# Altium PCB USB_Serial_CH340G.PcbDoc
Units mil, origin at the board's own origin, x right, y up, seen from the top; angles counter-clockwise.
Board outline 1910 x 690 mil, 2 copper layers (Top Layer, Bottom Layer); 17 components, 20 nets, 60 pads, 18 vias.
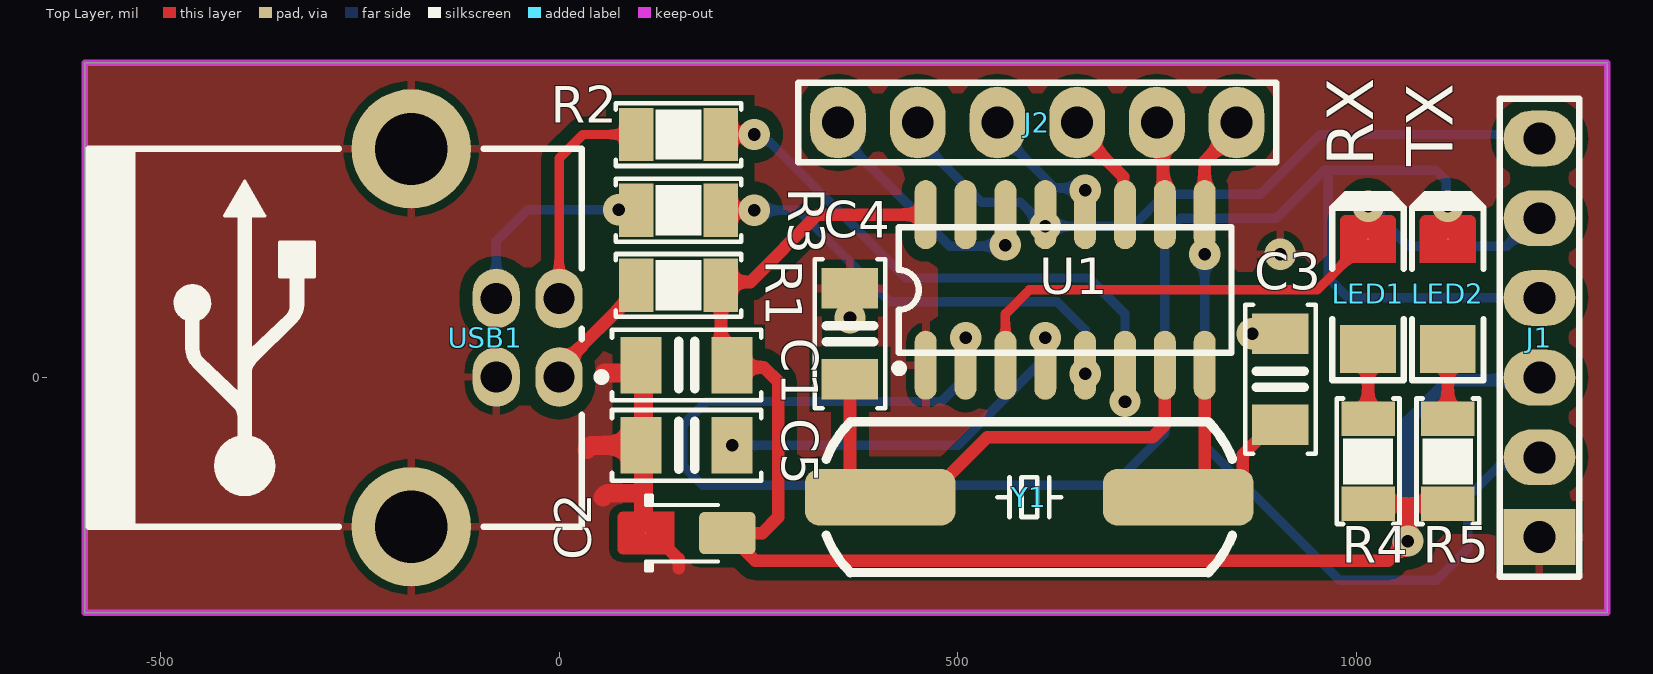
[diagram p0: Top Layer view]
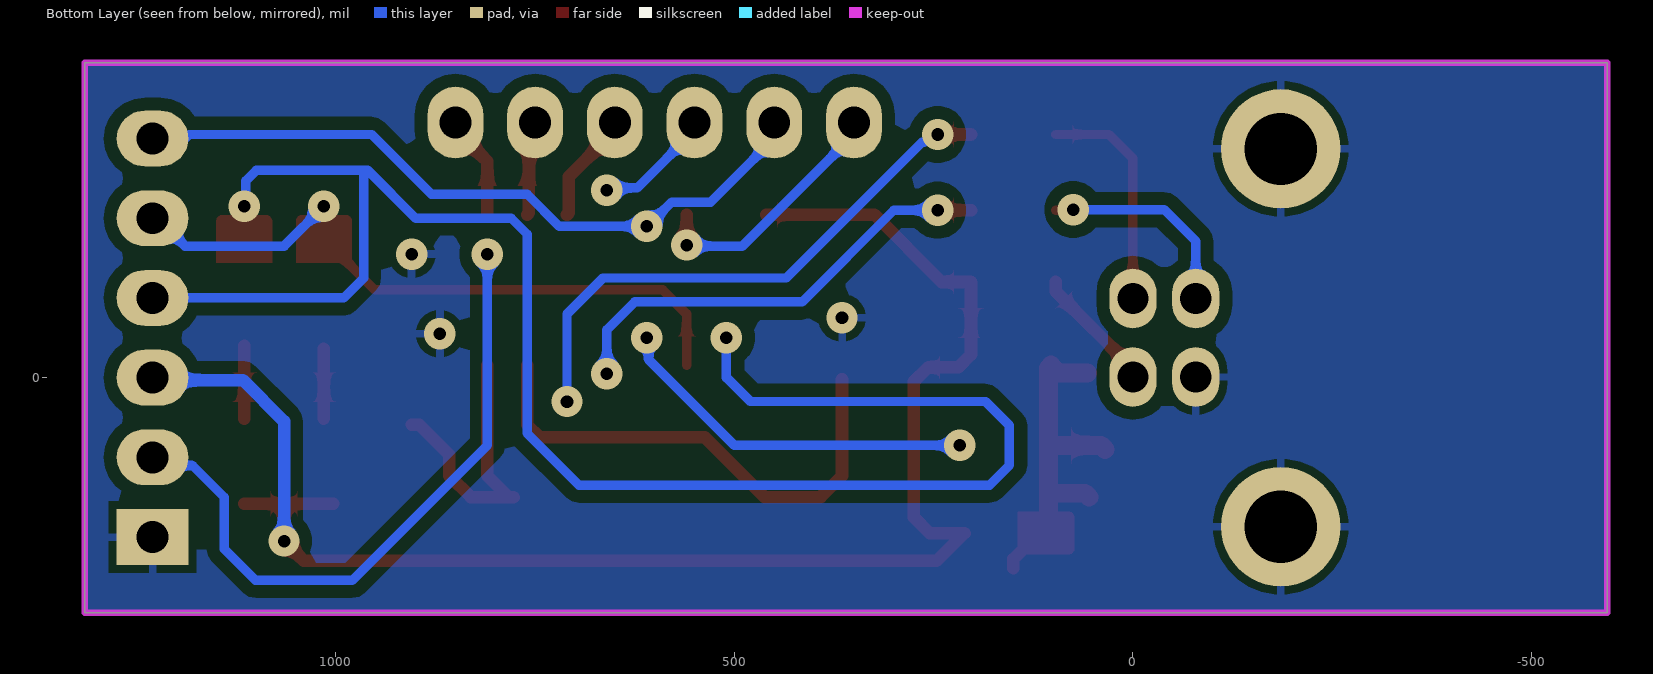
[diagram p1: Bottom Layer view, seen from below]
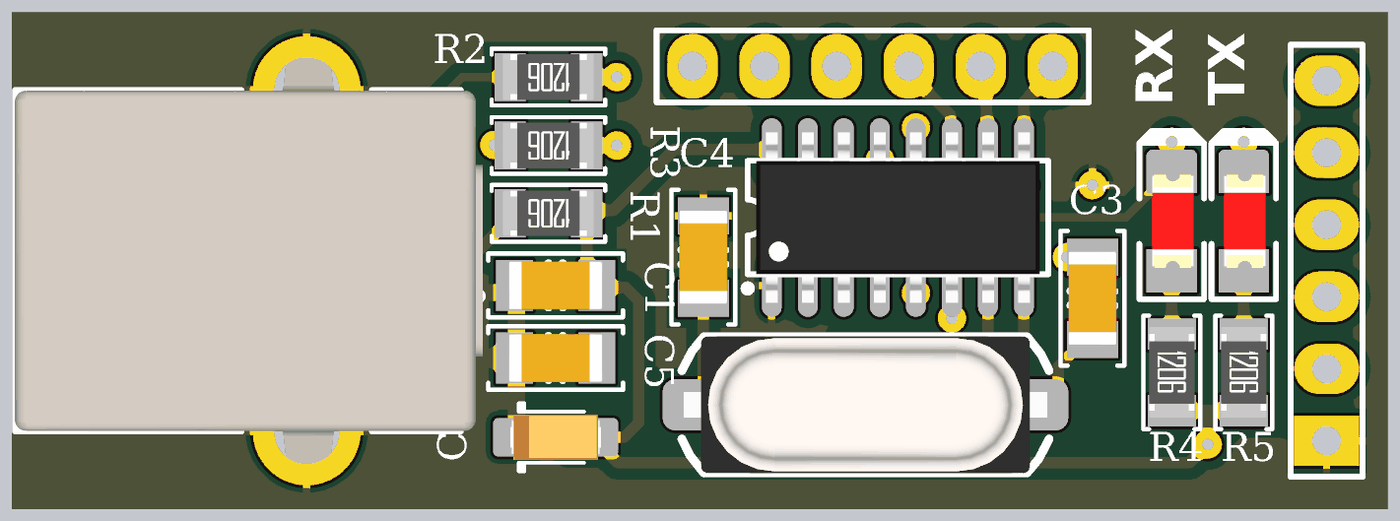
[diagram p2: 3D render of the assembled board from above, using the file's embedded part models]

## Layer stack, top to bottom
Top Solder: solder mask 0.4, Solder Resist, Dk 3.5
Top Layer: signal copper 1.4
Dielectric 1: dielectric 12.6, FR-4, Dk 4.8
Bottom Layer: signal copper 1.4
Bottom Solder: solder mask 0.4, Solder Resist, Dk 3.5

## Board outline
-595,-295.79 -595,394.21 1315,394.21 1315,-295.79

## Design rules (kind name [scope] priority, off if disabled: settings)
Clearance [All] p1: gap=15.75 ignorepadtopadclearanceinfootprint=FALSE
DiffPairsRouting [All] p1: maxlimit=10 minlimit=10 mostfreqgap=10 toplayer_minwidth=15 toplayer_maxwidth=15 toplayer_prefwidth=15 bottomlayer_minwidth=15 bottomlayer_maxwidth=15 bottomlayer_prefwidth=15 maxuncoupledlength=500
PolygonConnect [All] p1: connectstyle=Relief reliefconductorwidth=10 reliefentries=4 polygonreliefangle="90 Angle" airgapwidth=10
RoutingVias [All] p1: holewidth=28 width=50 viastyle="Through Hole" minholewidth=28 minwidth=50 maxholewidth=28 maxwidth=50
SolderMaskExpansion [All] p1: expansion=4 istentingtop=FALSE
Width [All] p1: maxlimit=39.37 minlimit=10 preferedwidth=11.81
29 further rules are at their usual default settings.

## Classes and differential pairs
differential pair class USB: USB_D
net class USB: USB_D_N USB_D_P
differential pair USB_D: +USB_D_P -USB_D_N

## Components (designator, comment, footprint, x,y, rotation, side; value= is the part's Value field where it differs from the comment)
C1 "100nF" "CAP 1206 (3216X15L)" 160,15 r0 top
C2 "1uF-35V" "CAP SMD A (EIA1206)" 160,-195.79 r180 top
C3 "22pF" "CAP 1206 (3216X15L)" 905,-2.87 r270 top
C4 "22pF" "CAP 1206 (3216X15L)" 365,54.21 r90 top
C5 "22nF" "CAP 1206 (3216X15L)" 160,-85.79 r180 top
J1 "CON1X6" HP6#1 1230,49.21 r90 top
J2 "CON1X6" HP6#2 600,319.21 r0 top
LED1 "RX" "LED 1206 SMD" 1015,104.21 r90 top
LED2 "TX" "LED 1206 SMD" 1115,104.21 r90 top
R1 "1.5" "RES 1206 (3216X08L)" 150,115 r180 top
R2 "27" "RES 1206 (3216X08L)" 150,304.21 r180 top
R3 "27" "RES 1206 (3216X08L)" 150,209.21 r180 top
R4 "1.5K" "RES 1206 (3216X08L)" 1015,-105.79 r270 top
R5 "1.5K" "RES 1206 (3216X08L)" 1115,-105.79 r270 top
U1 "CH340G" SO-16_M 635,109.21 r90 top
USB1 "USB Connector" USB2.5-2H4E -39.37,49.21 r180 top
Y1 "12MHz" XT_Crystal_SMD 590,-150.79 r0 top

## Footprints (in the part's own frame and the unit in brackets; to place one, negate y for a bottom-side part, rotate by r counter-clockwise, add the part's x,y. Pads: shape width x height; smd on the part's side, far side on the other; paste and mask are expansions set on the pad)
"CAP 1206 (3216X15L)" [mm] "Chip Capacitor, 2-Leads, Body 3.25x1.60mm, IPC High Density"
  rect 1.3x1.8 smd: 1(-1.45,0) 2(1.45,0)
  Top Layer pour cut-out: -1.45,0.9 1.45,0.9 1.45,-0.9 -1.45,-0.9
  silkscreen extent -2.38,-1.12 2.37,1.12, body extent -1.65,-0.85 1.65,0.85, height 0.94
"CAP SMD A (EIA1206)" [mm] "Capacitor, polarized, Molded Body, EIA 535BAAC size A; 3.20mm L X 1.60mm W X 1.80mm H, CAPMP3216X180N"
  rrect25% 1.8x1.35 smd: 1(-1.3,0)
  round 0.025 smd: 2(1.3,0)
  Top Layer pour cut-out: -1.3,0.675 1.3,0.675 1.3,-0.675 -1.3,-0.675
  Top Layer region: 2.031,-0.675 0.4,-0.675 0.4,0.675 2.031,0.675 2.096,0.662 2.151,0.626 2.187,0.571 2.2,0.506 2.2,0.506 2.2,-0.506 2.187,-0.571 2.151,-0.626 2.096,-0.662 2.031,-0.675
  silkscreen extent -1,-1.2 1.3,1.2, body extent -1.6,-0.8 1.6,0.8, height 1.8
HP6#1 [mil] "Pin Header, 1X6"
  rect 70x90 hole 40: 1(-250,0)
  oval 70x90 hole 40: 2(-150,0) 3(-50,0) 4(50,0) 5(150,0) 6(250,0)
  silkscreen extent -300,-50 300,50
HP6#2 [mil] "Pin Header, 1X6"
  oval 70x90 hole 40: 1(-250,0) 2(-150,0) 3(-50,0) 4(50,0) 5(150,0) 6(250,0)
  silkscreen extent -300,-50 300,50
"LED 1206 SMD" [mil] "LED, SMD 1206, Dimension: 3.2 x 1.6 x 0.68mm"
  rect 60x70 smd: 1(-68.9,0)
  round 1 smd: 2(68.9,0)
  Top Layer region: 91.4,-35 38.9,-35 38.9,35 91.4,35 94.27,34.43 96.7,32.8 98.33,30.37 98.9,27.5 98.9,27.5 98.9,-27.5 98.33,-30.37 96.7,-32.8 94.27,-34.43 91.4,-35
  silkscreen extent -108,-45 125,45, body extent -65,-30 65,27, height 54
"RES 1206 (3216X08L)" [mm] "Chip Resistor, 2-Leads, Body 3.2x1.6mm, Reflow Soldering, IPC High Density (0.125 W)"
  rect 1.1x1.7 smd: 1(-1.35,0) 2(1.35,0)
  silkscreen extent -2,-1 2,1, body extent -1.6,-0.8 1.6,0.8, height 0.6
SO-16_M [mm] "SOIC, 16-Leads, Body 10.15x3.90mm, Pitch 1.27mm"
  oval 2.2x0.7 smd: 1(-2.4,4.445) 2(-2.4,3.175) 3(-2.4,1.905) 4(-2.4,0.635) 5(-2.4,-0.635) 6(-2.4,-1.905) 7(-2.4,-3.175) 8(-2.4,-4.445) 9(2.4,-4.445) 10(2.4,-3.175) 11(2.4,-1.905) 12(2.4,-0.635) 13(2.4,0.635) 14(2.4,1.905) 15(2.4,3.175) 16(2.4,4.445)
  silkscreen extent -2.62,-5.3 2,5.42, body extent -3,-5 3,5, height 1.75
USB2.5-2H4E [mm] "Connector; USB1.1, Type B, Thru-Hole; 4 Position; Right Angle"
  oval 1.5x1.9 hole 1: 1(-1,1.25) 2(-1,-1.25) 3(1,-1.25) 4(1,1.25)
  round 3.8 hole 2.3: SH(3.71,6.02) SH(3.71,-6.02)
  silkscreen extent -2.48,-6.02 13.99,6.02, body extent -2.5,-7.45 14,7.45, height 10.95
XT_Crystal_SMD [mm] "SMD Crystal Oscillator, 2-Leads, Surface Mount, Package: HC49/US-SM"
  rrect50% 4.8x1.8 smd: 1(-4.75,0) 2(4.75,0)
  silkscreen extent -6.47,-2.4 6.47,2.4, body extent -6.4,-2.41 6.4,2.42, height 4.29

## Part data
C1: library part Cap-Bipolar, "Bipolar Capacitor", Voltage=100V
C2: library part CMP-1664-00002-2, "Tantalum Capacitor, 1uF, 50V, 2-Leads, SMD 1206", Capacitance=1uF, Case/Package=1206, Voltage=35V, Mounting Technology="Surface Mount", PackageDescription="2-Pin Surface Mount Device"
C3 C4 C5: library part C_NP_ASA
J1: library part HEADER-6POS, "CH340 UART Pinout"
J2: library part HEADER-6POS, "CH340 RS-232 Pinout"
LED1: library part LED, "LED 1206 Red", Color=Red, Size="SMD 1206"
LED2: library part LED, "LED 1206 Blue", Color=Blue, Size="SMD 1206"
R1 R2 R3: library part R_ASA
R4 R5: library part Resistor, "Resistor", Power="1/8 W", Tolerance=5%
U1: "USB to UART Interface SOIC-16 SMD"
USB1: library part USB-B, "USB Connector Type-B"
Y1: library part XT_ASA, "Crystal SMD 2-Leads"

## Via types
v1: diameter 39.37, hole 15.75, Top Layer to Bottom Layer, 18 vias

## Nets (pads, with @x,y where several pads share a name; then routed paths per layer and width w, separated by ;. In a path a pad name is that pad's centre, name@x,y a point inside that pad or via, vN(x,y) a via of type N, cw(c..) or ccw(c..) an arc to the next point about the centre after c; other vN are vias at no path point)
CH_XI: C4.1 U1.7 Y1.1 | length 639.5
  Top Layer w15.75: C4.1 365,-123.98 391.81,-150.79 Y1.1 462.05,-150.79 537.05,-75.79 744.21,-75.79 760,-60 U1.7
CH_XO: C3.2 U1.8 Y1.2 | length 357.7
  Top Layer w15.75: Y1.2 Y1.2@783.19,-150.79 ; U1.8 810,-123.98 Y1.2@783.19,-150.79 ; C3.2 895.16,-59.96 857.55,-97.57 857.55,-123.98 830.74,-150.79 Y1.2@783.19,-150.79
CTS: J1.2 J2.6 U1.9 | length 964.1
  Top Layer w15.75: U1.9 810,270.63 850,310.63 J2.6
  Bottom Layer w11.81: v1(810,154.21) 810,-85.79 979.21,-255 1100.79,-255 1140,-215.79 1140,-150.79 1179.53,-111.25 1219.54,-111.25 J1.2
DCD: J2.3 U1.12 | length 151.1
  Bottom Layer w11.81: J2.3 550,309.21 621.99,237.23 656.99,237.23 v1(660,234.21)
DSR: J2.5 U1.10 | length 119.7
  Top Layer w15.75: J2.5 757.74,311.47 757.74,205.96 U1.10
DTR: J1.6 J2.2 U1.13 | length 903.6
  Bottom Layer w11.81: J2.2 450,299.21 530,219.21 578.75,219.21 608.75,189.21 v1(610,189.21) 610.11,189.1 664.89,189.1 665,189.21 720,189.21 760,229.21 880,229.21 955,304.21 1183.99,304.21 1208.99,279.21 J1.6@1230,279.21
GND: C1.1 C2.2 C3.1 C4.2 C5.2 J1.1 U1.1 USB1.4 USB1.SH | length 451.8
  Top Layer w15.75: C2.2 117.68,-195.79 150,-228.11 150,-240
  Top Layer w23.62: 35,-90.79 40,-85.79 C5.2 ; 55,-150.79 60,-145.79 105.87,-145.79 ; 57.09,5 92.91,5 C1.1 ; C1.1@102.91,14.21 105.87,11.26 105.87,-85.79 105.87,-145.79 ; C2.2 105.87,-192.83 105.87,-145.79
  other v1: 869.57,54.21 365,74.21 905,154.21
NetC5_1: C5.1 U1.4 | length 463.5
  Bottom Layer w11.81: v1(217.09,-85.79) 500,-85.79 607.63,21.84 607.63,46.84 v1(610,49.21)
NetLED1_1: LED1.1 R4.1 | length 88
  Top Layer w15.75: R4.1 LED1.1
NetLED2_1: LED2.1 R5.1 | length 95.7
  Top Layer w15.75: R5.1 LED2.1 ; LED2.1 1115,39.21 LED2.1
NetR2_1: R2.1 U1.6 | length 710
  Top Layer w15.75: R2.1 v1(245,304.21)
  Bottom Layer w11.81: v1(245,304.21) 252.46,304.21 262.09,294.58 264.64,294.58 435,124.21 665,124.21 710,79.21 v1(710,-30.79)
NetR3_1: R3.1 U1.5 | length 574
  Top Layer w15.75: R3.1 v1(245,209.21)
  Bottom Layer w11.81: v1(245,209.21) 300,209.21 415,94.21 625,94.21 660,59.21 v1(660,4.21)
RI: J2.4 U1.11 | length 140.4
  Top Layer w15.75: J2.4 650,309.21 707.74,251.47 707.74,205.96 U1.11
RTS: J2.1 U1.14 | length 321.7
  Top Layer w15.75: v1(560,165.55) U1.14
  Bottom Layer w11.81: J2.1 350,304.21 490,164.21 558.66,164.21 v1(560,165.55)
RX: J1.5 LED1.2 U1.3 | length 841.4
  Top Layer w11.81: U1.3 560,79.21 590,109.21 951.1,109.21 LED1.2 v1(1015,214.21)
  Bottom Layer w11.81: v1(1015,214.21) 1065,164.21 1189.25,164.21 1204.25,179.21 J1.5@1230,179.21
TX: J1.4 LED2.2 U1.2 | length 2245.6
  Top Layer w15.75: LED2.2 v1(1115,214.21)
  Bottom Layer w11.81: v1(510,49.21) 510,-0.79 480,-30.79 185,-30.79 155,-60.79 155,-110.79 180,-135.79 695,-135.79 760,-70.79 760,179.21 780,199.21 900,199.21 959.17,258.38 ; 960,259.21 965,259.21 965,124.21 990,99.21 J1.4 ; 966.18,259.21 1100,259.21 1112.91,246.3 1112.91,216.3 v1(1115,214.21)
USB_D_N: R2.2 USB1.2 | length 280.9
  Top Layer w11.81: USB1.2@0,102.64 0,274.21 30,304.21 R2.2
USB_D_P: R3.2 USB1.3 | length 260.1
  Top Layer w11.81: v1(75,210) 75.79,209.21 R3.2
  Bottom Layer w11.81: USB1.3@-78.74,102.64 -78.74,170.47 -39.21,210 v1(75,210)
VCC: C1.2 C2.1 J1.3 R1.1 R4.2 R5.2 U1.16 | length 2086
  Top Layer w15.75: U1.16 324.49,203.7 240,119.21 203.15,119.21 203.15,28.15 219.16,12.14 257.07,12.14 275,-5.79 275,-175.79 255,-195.79 C2.1 246.18,-230.79 1040,-230.79 v1(1065,-205.79) ; R4.2@1003.19,-158.93 R4.2 1065,-158.93 ; v1(1065,-205.79) 1065,-158.93 ; R5.2 1065,-158.93
  Bottom Layer w15.75: v1(1065,-205.79) 1065,-55.79 1116.8,-3.99 1226.8,-3.99 J1.3
VUSB: R1.2 USB1.1 | length 155.1
  Top Layer w15.75: USB1.1@0,4.21 0,10.55 96.85,107.4 R1.2@96.85,119.21
pads on no net: U1.15

## Polygon pours and split planes (outlines as drawn)
GND on Bottom Layer "gnd_L01_P-001" (solid, remove dead copper, pour order 0): -595,394.21 1315,394.21 1315,-295.79 -595,-295.79
GND on Top Layer "gnd_L01_P-001" (solid, remove dead copper, pour order 1): -595,394.21 1315,394.21 1315,-295.79 -595,-295.79

## Keep-outs
Keep-Out Layer:
  the board outline again, w7.87

## Other copper
Top Layer:
  pour cut-out: 80,-225.79 80,353.43 245,353.43 245,-225.79
  pour cut-out: 985,-175 985,-35 1145,-35 1145,-175
  pour cut-out: 475,14.73 475,203.7 810,203.7 810,14.73